# EAGLE board BacKey for MaKey MaKey (rev A) - panelized (EAGLE 6.4)
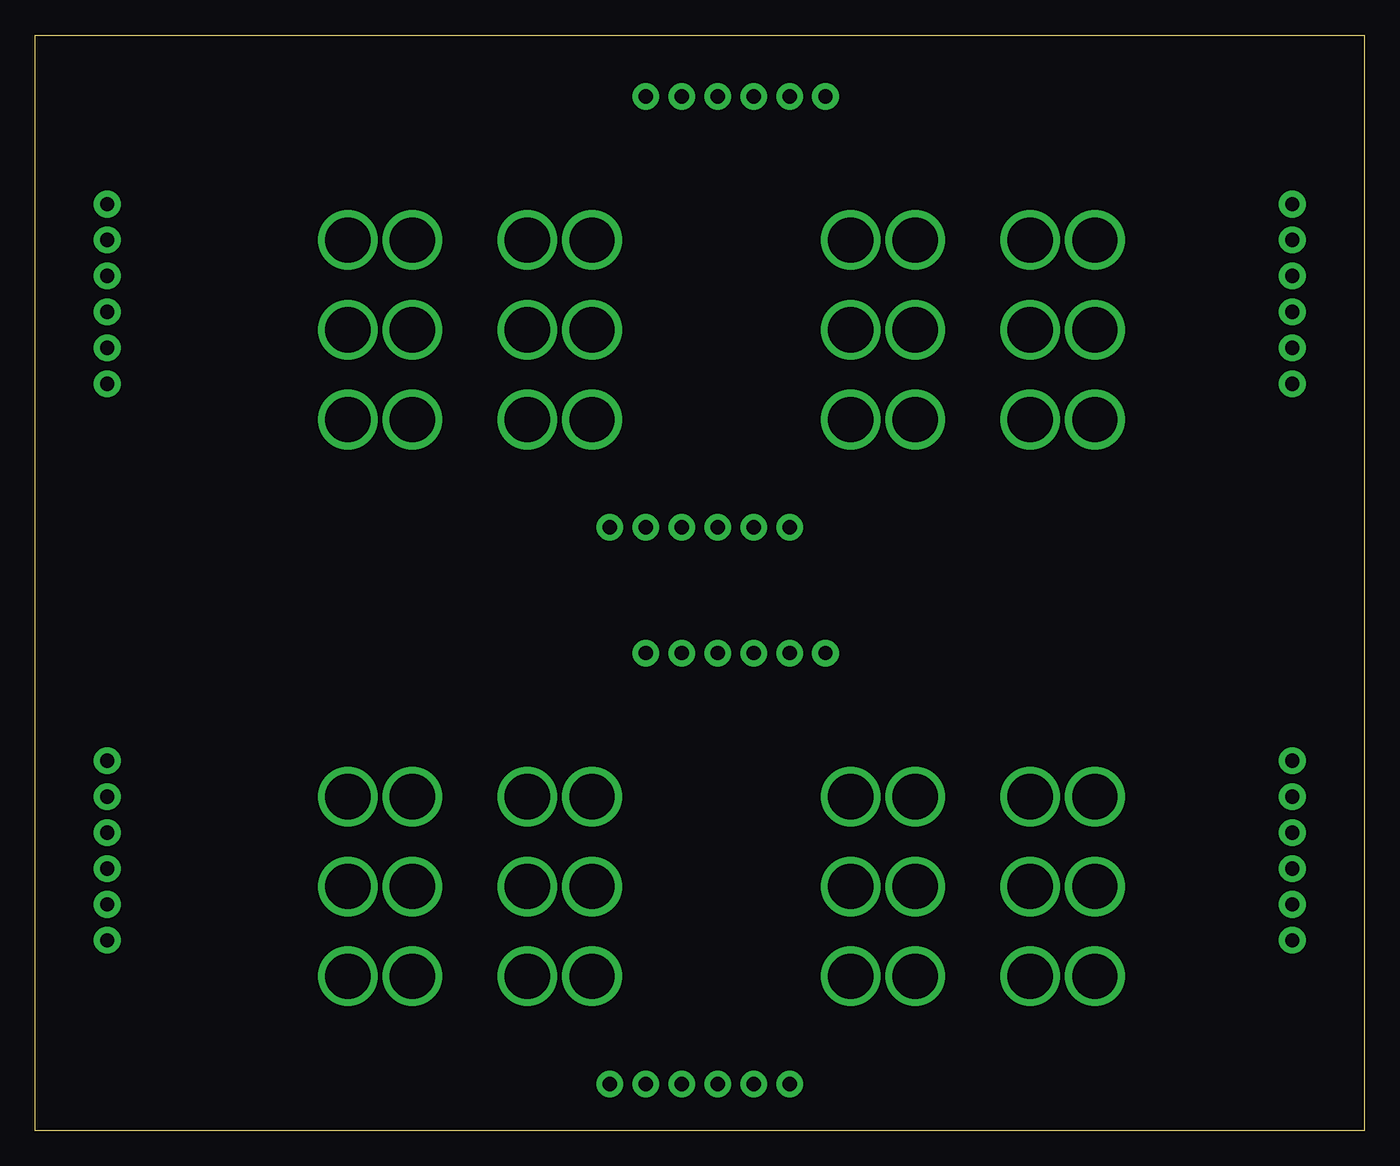
[diagram p0: board, top side]
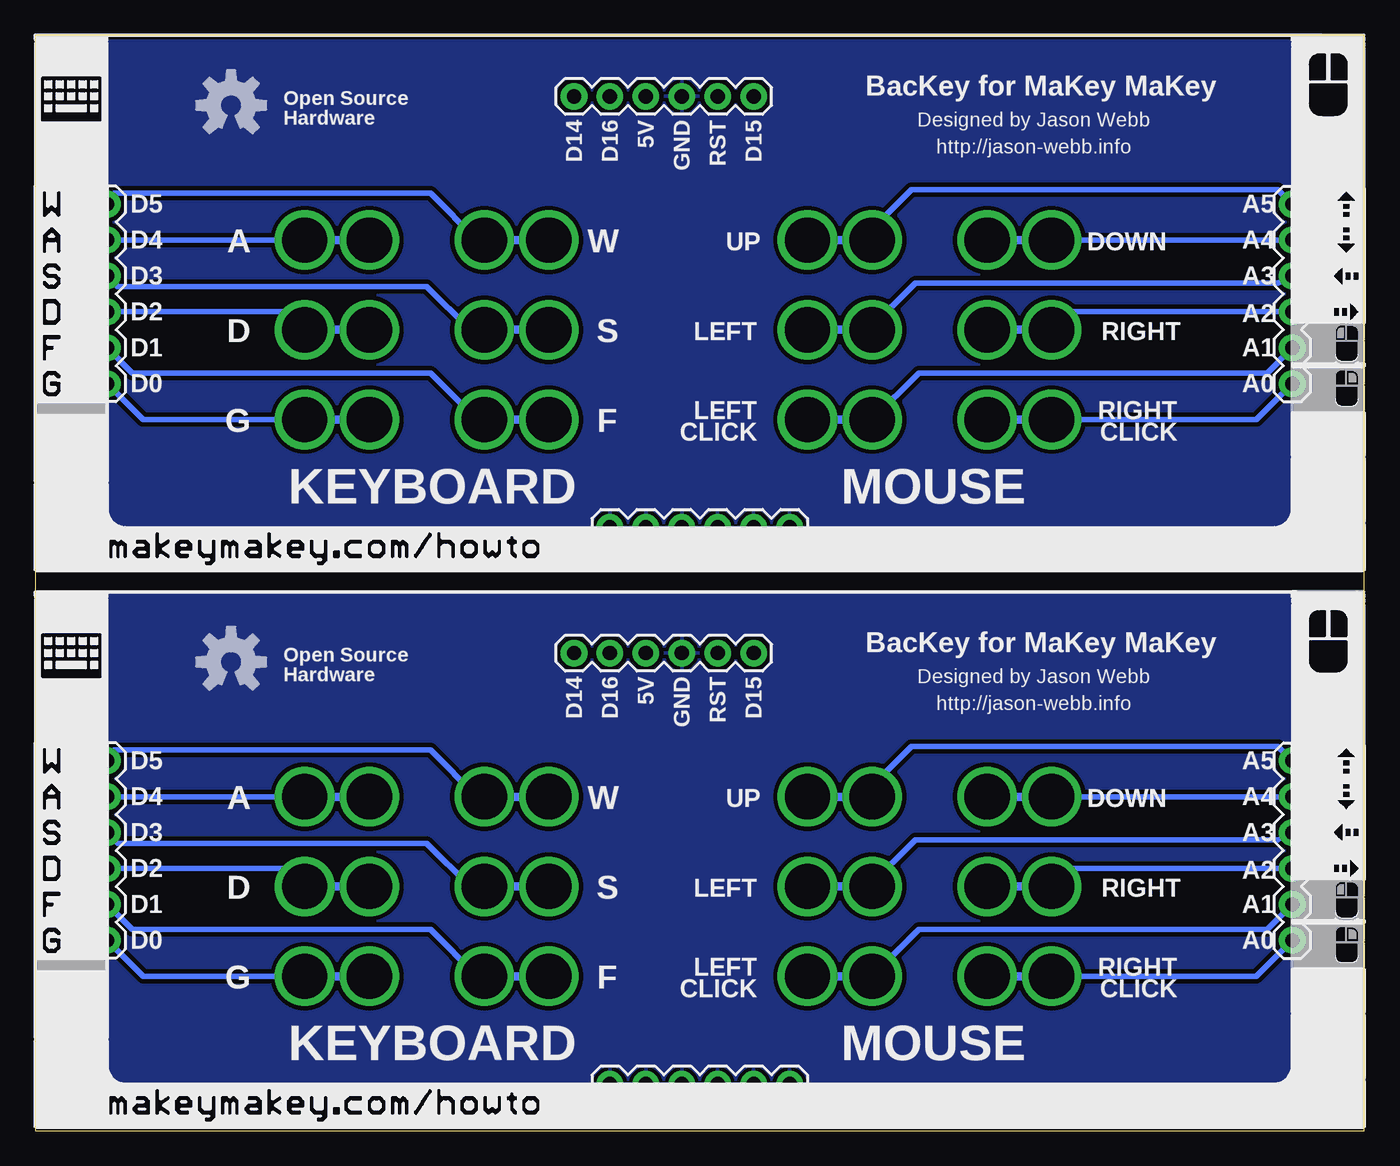
[diagram p1: board, bottom side, seen from below]

Size 93.98 x 77.47 mm. Coordinates in mm from the lower left corner, seen from the top.
Outline: 0,0 0,77.47 93.98,77.47 93.98,0 0,0
Copper layers (1*2*15*16): Top 0.035mm / dielectric 0.2mm / layer 2 0.0175mm / dielectric 1.1mm / layer 15 0.0175mm / dielectric 0.2mm / Bottom 0.035mm
Design rules "SeeedStudio_DRU_no_angle_20130527": minimum track width 6mil, minimum drill 12mil, track to track 6mil, track to pad 6mil, pad to pad 6mil, via to via 6mil, smd to smd 0mil, copper to edge 10mil, drill to drill 10mil, minimum pad ring 6mil, minimum via ring 6mil, stop-mask expansion 2mil, vias tented up to drill 25mil, thermal gap 10mil
Net classes: 0 default: width 0.203 mm

## Footprints (pad centres in the part's own frame; a part is rotated, then mirrored left to right if it is on the bottom)
1X06 = drill 1.016 pad 1.88: 1 0,0; 2 2.54,0; 3 5.08,0; 4 7.62,0; 5 10.16,0; 6 12.7,0

## Placement (x,y rotation side)
JP1  [1X06]  88.9,26.16 270 bottom
JP2  [1X06]  5.08,13.46 90 bottom
JP3  [1X06]  53.34,3.3 0 bottom
JP4  [1X06]  53.34,42.67 0 bottom
JP5  [1X06]  43.18,73.15 180 bottom
JP6  [1X06]  88.9,65.53 270 bottom
JP7  [1X06]  5.08,52.83 90 bottom
JP14  [1X06]  43.18,33.78 180 bottom
U$1  OSHW-LOGOM  [OSHW-LOGO-M]  80.14,33.15 0 bottom
U$2  OSHW-LOGOM  [OSHW-LOGO-M]  80.14,72.52 0 bottom

## Library data of the parts
JP1-JP7 JP14 = SparkFun-Connectors
U$1 U$2 = SparkFun-Aesthetics

## Nets
A0: JP2.1
A1: JP2.2
A2: JP2.3
A3: JP2.4
A4: JP2.5
A5: JP2.6
A6: JP7.1
A7: JP7.2
A8: JP7.3
A9: JP7.4
A10: JP7.5
A11: JP7.6
D0: JP1.6
D1: JP1.5
D2: JP1.4
D3: JP1.3
D4: JP1.2
D5: JP1.1
D6: JP5.5
D7: JP5.6
D8: JP5.1
D9: JP6.6
D10: JP6.5
D11: JP6.4
D12: JP6.3
D13: JP6.2
D14: JP14.6
D15: JP14.1
D16: JP14.5
D17: JP6.1
GND [vcc]: JP3.1 JP3.2 JP3.3 JP3.4 JP3.5 JP3.6 JP14.3
GND1 [vcc]: JP4.1 JP4.2 JP4.3 JP4.4 JP4.5 JP4.6 JP5.3
RESET: JP14.2
RESET1: JP5.2
VCC: JP14.4
VCC1: JP5.4

## Tracks (layer width: path | path; a pad name or v marks a point on that pad's centre or on a via)
A0  (via drill 3.2)
  Bottom 0.406: JP2.1 7.62,10.92 v22.1,10.92
  Bottom 0.61: v26.67,10.92 v22.1,10.92
A1  (via drill 3.2)
  Bottom 0.406: JP2.2 6.86,14.22 31.5,14.22 v34.8,10.92
  Bottom 0.61: v39.37,10.92 v34.8,10.92
A2  (via drill 3.2)
  Bottom 0.406: JP2.3 20.83,18.54 v22.1,17.27
  Bottom 0.61: v26.67,17.27 v22.1,17.27
A3  (via drill 3.2)
  Bottom 0.406: JP2.4 6.1,20.57 31.75,20.57 35.05,17.27 35.31,17.27
  Bottom 0.61: 34.8,17.53 v34.8,17.27 35.31,17.27 v39.37,17.27
A4  (via drill 3.2)
  Bottom 0.406: JP2.5 v22.1,23.62
  Bottom 0.61: v26.67,23.62 v22.1,23.62
A5  (via drill 3.2)
  Bottom 0.406: JP2.6 6.1,27.18 32,27.18 34.8,24.38 v34.8,23.62
  Bottom 0.61: v39.37,23.62 v34.8,23.62
A6  (via drill 3.2)
  Bottom 0.406: JP7.1 7.62,50.29 v22.1,50.29
  Bottom 0.61: v26.67,50.29 v22.1,50.29
A7  (via drill 3.2)
  Bottom 0.406: JP7.2 6.86,53.59 31.5,53.59 v34.8,50.29
  Bottom 0.61: v39.37,50.29 v34.8,50.29
A8  (via drill 3.2)
  Bottom 0.406: JP7.3 20.83,57.91 v22.1,56.64
  Bottom 0.61: v26.67,56.64 v22.1,56.64
A9  (via drill 3.2)
  Bottom 0.406: JP7.4 6.1,59.94 31.75,59.94 35.05,56.64 35.31,56.64
  Bottom 0.61: 34.8,56.9 v34.8,56.64 35.31,56.64 v39.37,56.64
A10  (via drill 3.2)
  Bottom 0.406: JP7.5 v22.1,62.99
  Bottom 0.61: v26.67,62.99 v22.1,62.99
A11  (via drill 3.2)
  Bottom 0.406: JP7.6 6.1,66.55 32,66.55 34.8,63.75 v34.8,62.99
  Bottom 0.61: v39.37,62.99 v34.8,62.99
D0  (via drill 3.2)
  Bottom 0.406: JP1.6 86.36,10.92 v74.93,10.92
  Bottom 0.61: v70.36,10.92 v74.93,10.92
D1  (via drill 3.2)
  Bottom 0.406: JP1.5 87.12,14.22 66.04,14.22 62.74,10.92
  Bottom 0.61: 62.74,10.92 v62.23,10.92 v57.66,10.92
D2  (via drill 3.2)
  Bottom 0.406: JP1.4 76.2,18.54 v74.93,17.27
  Bottom 0.61: v70.36,17.27 v74.93,17.27
D3  (via drill 3.2)
  Bottom 0.406: JP1.3 88.14,20.32 66.29,20.32 63.25,17.27
  Bottom 0.61: 63.25,17.27 v62.23,17.27 v57.66,17.27
D4  (via drill 3.2)
  Bottom 0.406: JP1.2 v74.93,23.62
  Bottom 0.61: v70.36,23.62 v74.93,23.62
D5  (via drill 3.2)
  Bottom 0.406: 62.74,23.62 66.04,26.92 88.39,26.92 88.9,26.42 JP1.1
  Bottom 0.61: 62.74,23.62 v62.23,23.62 v57.66,23.62
D9  (via drill 3.2)
  Bottom 0.406: JP6.6 86.36,50.29 v74.93,50.29
  Bottom 0.61: v70.36,50.29 v74.93,50.29
D10  (via drill 3.2)
  Bottom 0.406: JP6.5 87.12,53.59 66.04,53.59 62.74,50.29
  Bottom 0.61: 62.74,50.29 v62.23,50.29 v57.66,50.29
D11  (via drill 3.2)
  Bottom 0.406: JP6.4 76.2,57.91 v74.93,56.64
  Bottom 0.61: v70.36,56.64 v74.93,56.64
D12  (via drill 3.2)
  Bottom 0.406: JP6.3 88.14,59.69 66.29,59.69 63.25,56.64
  Bottom 0.61: 63.25,56.64 v62.23,56.64 v57.66,56.64
D13  (via drill 3.2)
  Bottom 0.406: JP6.2 v74.93,62.99
  Bottom 0.61: v70.36,62.99 v74.93,62.99
D17  (via drill 3.2)
  Bottom 0.406: 62.74,62.99 66.04,66.29 88.39,66.29 88.9,65.79 JP6.1
  Bottom 0.61: 62.74,62.99 v62.23,62.99 v57.66,62.99
GND
  pour Bottom (isolate 0.305): 5.21,38.1 5.08,3.3 88.9,3.3 89.03,38.1
GND1
  pour Bottom (isolate 0.305): 5.21,77.47 5.08,42.67 88.9,42.67 89.03,77.47

## Text on the board
bPlace: BacKey for MaKey MaKey | Open Source | Designed by Jason Webb | D15 | RST | GND | 5V | D16 | D14 | Hardware | http://jason-webb.info | A5 | D5 | A4 | D4 | DOWN | UP | W | A | A3 | D3 | A2 | D2 | RIGHT | LEFT | S | D | A1 | D1 | A0 | D0 | RIGHT | LEFT | CLICK | CLICK | F | G | MOUSE | KEYBOARD | BacKey for MaKey MaKey | Open Source | Designed by Jason Webb | D15 | RST | GND | 5V | D16 | D14 | Hardware | http://jason-webb.info | A5 | D5 | A4 | D4 | DOWN | UP | W | A | A3 | D3 | D2 | A2 | RIGHT | LEFT | A1 | S | D | D1 | A0 | D0 | RIGHT | LEFT | F | G | CLICK | CLICK | MOUSE | KEYBOARD